# EAGLE board 7Segment_Shield (EAGLE 6.1)
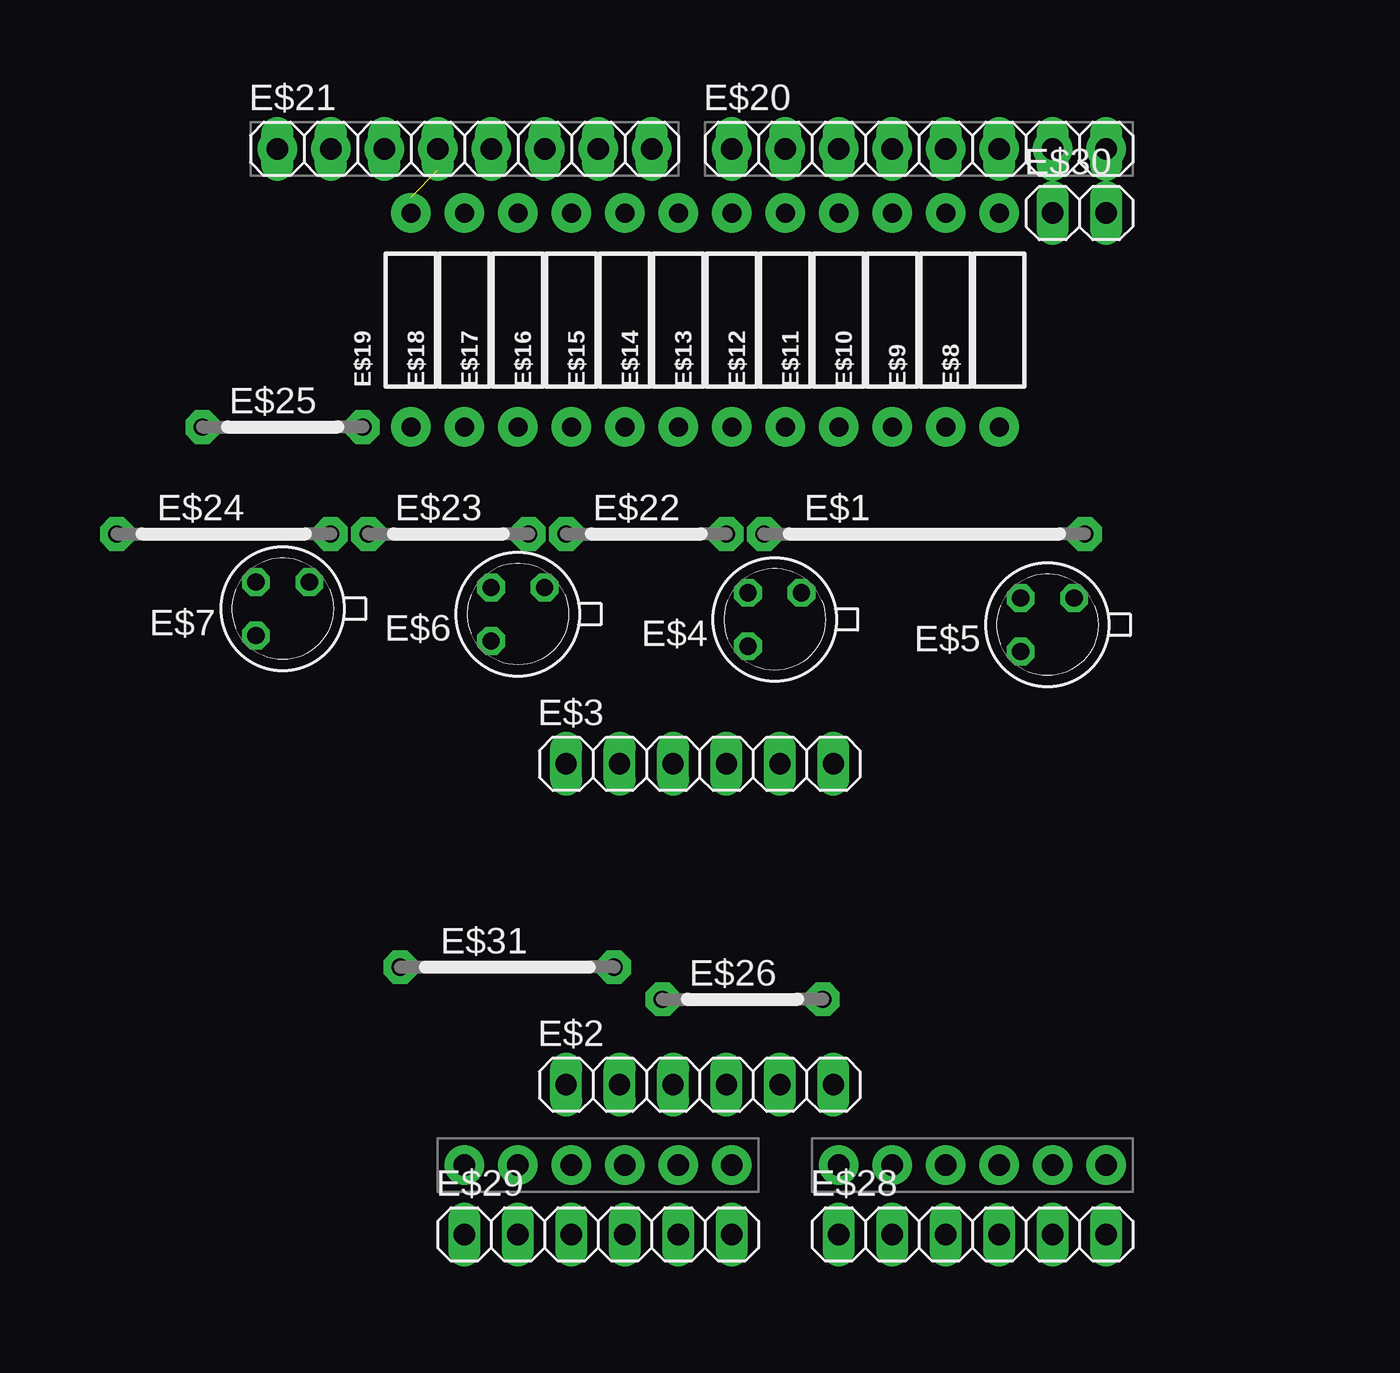
[diagram p0: board, top side]
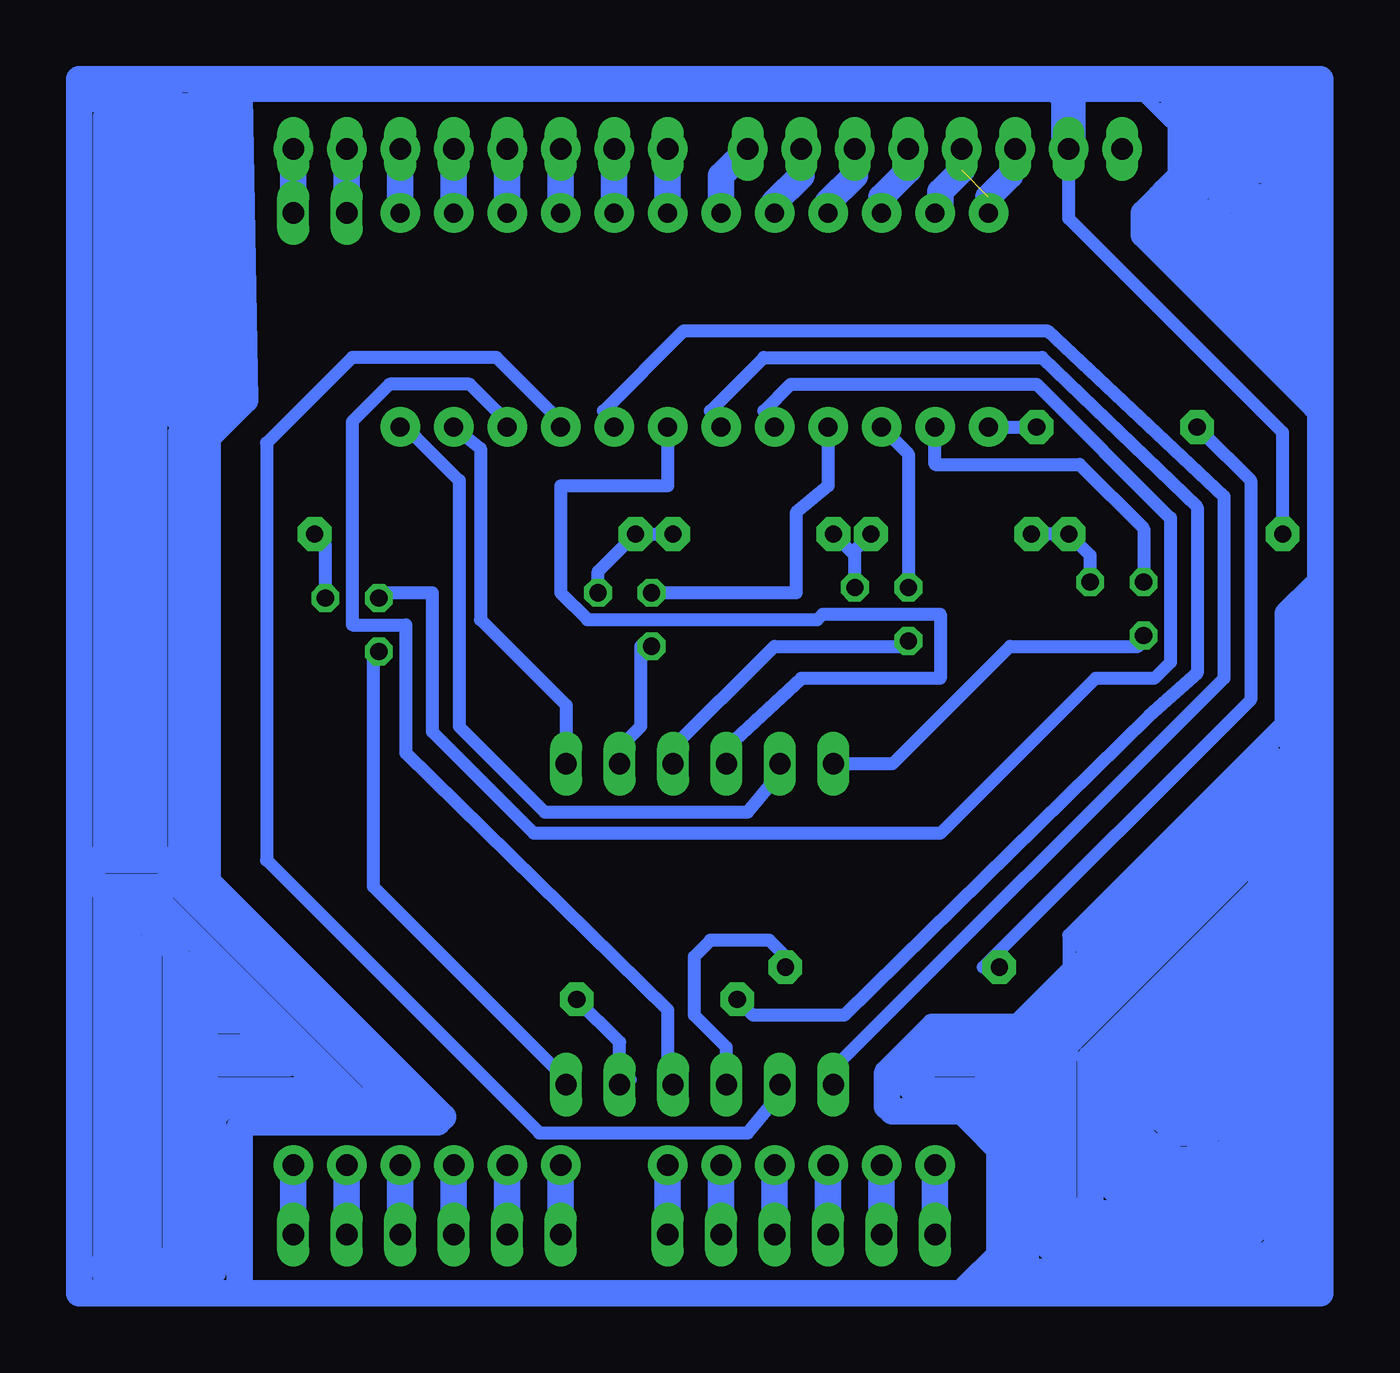
[diagram p1: board, bottom side, seen from below]

No outline drawn. Coordinates in mm, seen from the top.
Copper layers (1*16): Top 0.035mm / dielectric 1.5mm / Bottom 0.035mm
Design rules: minimum track width 10mil, minimum drill 24mil, track to track 8mil, track to pad 8mil, pad to pad 8mil, via to via 8mil, smd to smd 8mil, copper to edge 40mil, drill to drill 8mil, minimum pad ring 10mil, minimum via ring 8mil, stop-mask expansion 4mil, vias tented up to drill 0mil, thermal gap 10mil

## Footprints (pad centres in the part's own frame; a part is rotated, then mirrored left to right if it is on the bottom)
15 = drill 0.813 pad 1.6 octagon: 1 -7.62,0; 2 7.62,0
1X06 = drill 1.016 long: 1 -6.35,0; 2 -3.81,0; 3 -1.27,0; 4 1.27,0; 5 3.81,0; 6 6.35,0
TO18A = drill 0.813 octagon: B 1.27,-1.27; C 1.27,1.27; E -1.27,-1.27
AXIAL-0.4 = drill 0.9 pad 1.88: P$1 -5.08,0; P$2 5.08,0
1X08 = drill 1.016 long: 1 -8.89,0; 2 -6.35,0; 3 -3.81,0; 4 -1.27,0; 5 1.27,0; 6 3.81,0; 7 6.35,0; 8 8.89,0
07 = drill 0.813 pad 1.6 octagon: 1 -3.81,0; 2 3.81,0
10 = drill 0.813 pad 1.6 octagon: 1 -5.08,0; 2 5.08,0
DUEMILANOVE_VIAS = drill 1.016 pad 1.88: 3.3V 50.8,13.97; 5V 50.8,16.51; A0 50.8,29.21; A1 50.8,31.75; A2 50.8,34.29; A3 50.8,36.83; A4 50.8,39.37; A5 50.8,41.91; AREF 2.54,2.54; D2 2.54,36.83; D3 2.54,34.29; D4 2.54,31.75; D5 2.54,29.21; D6 2.54,26.67; D7 2.54,24.13; D8 2.54,20.32; D9 2.54,17.78; D10 2.54,15.24; D11 2.54,12.7; D12 2.54,10.16; D13 2.54,7.62; GND@0 50.8,19.05; GND@1 50.8,21.59; GND@2 2.54,5.08; RES 50.8,11.43; RX 2.54,41.91; TX 2.54,39.37; VIN 50.8,24.13
1X02 = drill 1.016 long: 1 -1.27,0; 2 1.27,0

## Placement (x,y rotation side)
E$1  [15]  53.09,52.58 0 top
E$2  [1X06]  42.42,26.42 0 top
E$3  [1X06]  42.42,41.66 0 top
E$4  [TO18A]  45.97,48.51 180 top
E$5  [TO18A]  58.93,48.26 180 top
E$6  [TO18A]  33.78,48.77 180 top
E$7  [TO18A]  22.61,49.02 180 top
E$8  [AXIAL-0.4]  56.64,62.74 90 top
E$9  [AXIAL-0.4]  54.1,62.74 90 top
E$10  [AXIAL-0.4]  51.56,62.74 90 top
E$11  [AXIAL-0.4]  49.02,62.74 90 top
E$12  [AXIAL-0.4]  46.48,62.74 90 top
E$13  [AXIAL-0.4]  43.94,62.74 90 top
E$14  [AXIAL-0.4]  41.4,62.74 90 top
E$15  [AXIAL-0.4]  38.86,62.74 90 top
E$16  [AXIAL-0.4]  36.32,62.74 90 top
E$17  [AXIAL-0.4]  33.78,62.74 90 top
E$18  [AXIAL-0.4]  31.24,62.74 90 top
E$19  [AXIAL-0.4]  28.7,62.74 90 top
E$20  [1X08]  52.83,70.87 0 top
E$21  [1X08]  31.24,70.87 0 top
E$22  [07]  39.88,52.58 0 top
E$23  [07]  30.48,52.58 0 top
E$24  [10]  19.81,52.58 0 top
E$25  [07]  22.61,57.66 0 top
E$26  [07]  44.45,30.48 0 top
E$27  [DUEMILANOVE_VIAS]  19.81,73.41 270 top
E$28  [1X06]  55.37,19.3 0 top
E$29  [1X06]  37.59,19.3 0 top
E$30  [1X02]  60.45,67.82 0 top
E$31  [10]  33.27,32 0 top

## Library data of the parts
E$1 E$22-E$26 E$31 = jumper
E$2 E$3 E$20 E$21 E$28-E$30 = pinhead
E$4-E$7 = ref-packages
E$8-E$19 = SparkFun-Passives
E$27 = SparkFun-Boards

## Nets
S$1: E$8.P$2
S$2: E$9.P$2
S$3: E$10.P$2
S$4: E$11.P$2
S$5: E$12.P$2
S$6: E$13.P$2
S$7: E$14.P$2
S$9: E$16.P$2
S$10: E$17.P$2
S$12: E$7.B E$18.P$1
S$13: E$6.B E$17.P$1
S$14: E$4.B E$16.P$1
S$15: E$5.B E$15.P$1
S$16: E$7.E E$23.1 E$24.2
S$17: E$3.1 E$7.C
S$18: E$3.4 E$6.C
S$19: E$3.5 E$4.C
S$20: E$3.2 E$8.P$1
S$21: E$3.6 E$9.P$1
S$22: E$2.4 E$10.P$1
S$23: E$2.2 E$11.P$1
S$24: E$3.3 E$13.P$1
S$25: E$2.6 E$5.C
S$26: E$14.P$1 E$26.1
S$27: E$6.E E$22.1 E$23.2
S$28: E$1.1 E$4.E
S$29: E$19.P$1 E$25.2
S$30: E$1.2 E$5.E
S$31: E$2.1 E$12.P$1
S$32: E$2.5
S$33: E$26.2
S$34: E$21.2 E$24.1
S$36: E$27.RES
S$37: E$27.3.3V E$29.2
S$38: E$27.5V
S$39: E$27.GND@0 E$29.4
S$40: E$27.GND@1
S$41: E$27.VIN E$29.6
S$42: E$27.A0 E$28.1
S$43: E$27.A1 E$28.2
S$44: E$27.A2 E$28.3
S$45: E$27.A3
S$46: E$27.A4
S$47: E$27.A5
S$48: E$30.1
S$49: E$20.8 E$30.2
S$52: E$2.3 E$31.2

## Tracks (layer width: path | path; a pad name or v marks a point on that pad's centre or on a via)
S$1
  Bottom 1.27: E$8.P$2 56.64,71.12
S$2
  Bottom 1.27: E$9.P$2 54.1,70.87
S$3
  Bottom 1.27: E$10.P$2 51.56,70.87
S$4
  Bottom 1.27: E$11.P$2 49.02,70.87
S$5
  Bottom 1.27: E$12.P$2 46.48,70.87
S$6
  Bottom 1.27: E$13.P$2 43.94,70.87
S$7
  Bottom 1.27: E$14.P$2 41.4,69.6 40.13,70.87
S$8
  Bottom 1.27: 38.86,68.07 38.86,68.33 37.59,69.6 37.59,70.87
S$9
  Bottom 1.27: E$16.P$2 36.32,68.33 35.05,69.6 35.05,70.87
S$10
  Bottom 1.27: E$17.P$2 33.78,68.58 32.51,69.85 32.51,70.87
S$11  (1 unrouted)
  Bottom 1.27: 30.99,67.82 30.99,68.83 29.97,69.85 | 28.7,67.56 28.7,68.58 27.69,69.6
S$12
  Bottom 0.61: E$7.B 21.34,52.83 24.38,55.88 31.24,55.88 E$18.P$1
S$13
  Bottom 0.254: 32.51,49.78 E$6.B
  Bottom 0.61: E$6.B 32.51,56.39 E$17.P$1
S$14
  Bottom 0.254: 45.21,49.78 E$4.B
  Bottom 0.61: E$4.B 37.85,49.78 37.85,53.59 36.32,54.86 E$16.P$1
S$15
  Bottom 0.254: 57.91,49.78 E$5.B
  Bottom 0.61: 57.91,49.78 55.12,49.78 55.12,43.18 50.29,38.35 30.99,38.35 23.62,45.72 20.83,45.72 20.07,46.48 20.07,53.34 26.42,59.69 38.1,59.69 39.37,58.42 E$15.P$1
S$16
  Bottom 0.61: E$7.E 23.88,51.56 E$24.2 E$23.1
S$17
  Bottom 0.61: E$7.C 21.59,47.24 27.69,47.24 33.27,41.66 E$3.1
S$18
  Bottom 0.254: 32.51,47.24 E$6.C
  Bottom 0.61: 32.51,47.24 38.86,47.24 43.94,42.16 E$3.4
S$19
  Bottom 0.61: E$4.C 45.21,47.24 45.21,43.43 46.48,42.16 E$3.5
S$20
  Bottom 0.61: E$3.2 38.86,40.89 40.13,39.37 49.78,39.37 53.85,43.43 53.85,55.12 55.88,57.15 E$8.P$1
S$21
  Bottom 0.61: E$3.6 48.77,44.45 52.83,48.51 52.83,56.64 E$9.P$1
S$22
  Bottom 0.61: E$2.4 43.94,26.92 43.94,29.97 56.39,42.16 56.39,48.26 58.93,48.26 58.93,57.91 57.15,59.69 53.34,59.69 52.07,58.42 E$10.P$1
S$23
  Bottom 0.61: E$2.2 38.86,25.65 40.13,24.13 50.04,24.13 62.99,37.08 62.99,56.9 58.93,60.96 52.07,60.96 49.53,58.42 E$11.P$1
S$24
  Bottom 0.61: E$13.P$1 43.94,54.86 49.02,54.86 49.02,49.78 47.75,48.51 36.83,48.51 36.58,48.77 30.99,48.77 30.99,45.72 37.59,45.72 41.4,42.16 E$3.3
S$25
  Bottom 0.254: 57.91,47.24 E$5.C
  Bottom 0.61: 57.91,47.24 57.91,35.81 49.02,26.92 E$2.6
S$26
  Bottom 0.61: E$14.P$1 41.91,58.42 39.37,60.96 26.16,60.96 18.8,53.85 18.8,45.97 21.08,43.94 35.56,29.72 39.88,29.72 E$26.1
S$27
  Bottom 0.61: E$6.E 35.05,51.56 | 35.05,51.56 E$22.1 | 35.05,51.56 35.05,51.82 E$23.2
S$28
  Bottom 0.61: E$4.E 47.24,50.8 E$1.1 43.43,52.58
S$29
  Bottom 0.61: E$19.P$1 E$25.2
S$30
  Bottom 0.61: E$5.E 60.2,52.07 E$1.2
S$31
  Bottom 0.61: E$2.1 36.32,26.92 17.53,45.72 17.53,54.36 25.91,62.23 43.18,62.23 46.99,58.42 E$12.P$1
S$32
  Bottom 0.61: 45.72,26.67 E$2.5
S$33
  Bottom 0.61: 46.23,26.67 46.23,28.45 E$26.2
S$34
  Bottom 0.61: E$24.1 14.73,57.4 24.89,67.56 E$21.2 24.89,72.64
S$35
  Bottom 0.61: 17.53,72.14 20.07,72.14 21.84,73.91
S$36
  Bottom 1.27: E$27.RES 31.24,19.05
S$37
  Bottom 1.27: E$27.3.3V E$29.2
S$38
  Bottom 1.27: E$27.5V 36.32,19.05
S$39
  Bottom 1.27: E$27.GND@0 E$29.4
S$40
  Bottom 1.27: E$27.GND@1 41.4,19.05
S$41
  Bottom 1.27: E$27.VIN E$29.6
S$42
  Bottom 1.27: E$27.A0 E$28.1
S$43
  Bottom 1.27: E$27.A1 E$28.2
S$44
  Bottom 1.27: E$27.A2 E$28.3
S$45
  Bottom 1.27: E$27.A3 56.64,19.05
S$46
  Bottom 1.27: E$27.A4 59.18,19.05
S$47
  Bottom 1.27: E$27.A5 61.72,19.05
S$48
  Bottom 1.27: E$30.1 59.18,71.37
S$49
  Bottom 1.27: E$30.2 E$20.8
S$50
  Bottom 0.61: 71.88,16.51 71.88,72.9 64.26,73.41 25.65,73.41 | 25.65,73.41 24.89,73.41 | 24.89,73.41 13.46,73.41 12.95,72.39 | 24.89,73.41 25.15,73.15 25.15,70.61 24.89,70.87 24.89,73.41 | 25.4,70.87 25.4,73.15 25.65,73.41 | 14.48,47.5 14.48,43.94 24.89,33.53 24.89,32 27.43,29.46 31.5,29.46 33.78,27.18
  Bottom 1.27: 12.95,59.94 20.57,67.56 20.57,68.58 | 20.57,68.58 20.32,68.83 | 20.32,68.83 19.56,69.6 19.56,72.14 20.07,72.64 13.46,72.64 12.95,72.39 | 12.95,72.39 12.95,59.94 | 12.95,59.94 12.95,58.67 | 12.95,58.67 12.95,50.04 | 12.95,50.04 12.95,16.51 71.88,16.51 71.88,74.17 12.95,74.17 12.95,72.39 | 12.95,50.04 13.21,50.04 14.48,48.77 14.48,47.5 14.48,43.69 | 64.26,73.41 64.01,58.93 65.79,57.15 65.79,36.07 | 64.26,16.76 64.26,24.38 64.01,24.64 54.86,24.64 54.61,24.89 65.79,36.07 | 65.79,36.07 66.8,37.08 71.37,37.08 | 12.95,58.67 13.21,58.67 21.34,66.8 21.34,67.82 20.57,68.58 | 20.32,68.83 19.81,68.83 18.8,67.82 18.29,67.82 14.48,64.01 14.48,69.6 15.75,70.87
S$51
  Bottom 0.61: 24.38,70.87 24.38,73.15
S$52
  Bottom 0.61: E$31.2 38.35,32.51 39.12,33.27 41.91,33.27 42.67,32.51 42.67,29.72 41.15,28.19 E$2.3
S$53
  Bottom 1.27: 26.92,17.78 26.92,22.86 | 26.92,22.86 26.92,28.96 | 26.92,22.86 27.69,22.86 29.97,25.15 33.27,25.15 33.53,25.4 33.53,26.92 32.51,27.94 32.26,27.94 32,27.69 29.46,27.69
S$54
  Bottom 1.27: 26.67,29.72 14.48,41.91
S$55
  Bottom 0.406: 23.88,27.69 24.38,27.69 24.64,27.94
  Bottom 1.27: 14.48,41.15 14.48,40.39 25.91,28.96 25.91,18.8 25.4,18.29 15.49,18.29 14.99,18.8 14.99,38.61 14.73,38.86 14.73,38.61 25.15,28.19 25.15,20.07 24.38,19.3 16.26,19.3 15.24,20.32 15.24,35.56 15.75,36.07 15.75,35.81 23.88,27.69 23.88,20.83 24.38,20.32 24.38,19.56 25.4,18.54 24.89,18.54 23.11,20.32 16.76,20.32 16.26,20.83 16.26,33.78 16.51,34.04 16.51,33.78 22.86,27.43 22.86,21.59 22.35,21.08 17.53,21.08 17.02,21.59 17.02,24.13 | 17.02,24.13 17.02,31.5 17.53,32 17.53,31.5 21.84,27.18 21.84,28.96 16.26,34.54 16.26,23.37 17.78,21.84 21.59,21.84 22.35,22.61 22.35,25.91 21.59,26.67 21.08,26.67 17.78,29.97 17.78,27.69 18.8,27.69 | 18.8,27.69 19.05,27.43 | 18.8,27.69 18.54,27.94 18.29,27.94 17.78,27.43 18.03,27.18 19.81,27.18 | 21.08,27.18 19.81,27.18 | 19.81,27.18 18.54,25.91 14.73,25.91 14.48,25.65 21.08,25.65 21.59,26.16 20.07,26.16 19.81,25.91 19.56,26.16 21.84,26.16 22.61,25.4 18.29,25.4 17.02,24.13 | 17.02,24.13 17.27,24.13 17.53,24.38 20.07,24.38 20.57,24.89 21.59,24.89 21.59,24.13 21.08,23.62 21.08,22.86 18.03,22.86 17.78,23.11 18.03,23.11 19.05,24.13 19.81,24.13 20.32,23.62
S$56
  Bottom 1.27: 13.72,61.47 13.72,71.37 14.22,71.88 18.03,71.88 18.54,71.37 18.54,69.09 19.81,67.82 19.56,67.82 14.22,62.48 14.22,70.36 14.99,71.12 17.27,71.12 17.53,70.87 17.53,68.33 18.03,67.82 14.99,64.77 14.99,69.34 15.49,69.85 16.26,69.85 16.51,70.1 16.51,67.82 15.49,66.8 15.49,68.33 15.75,68.58
S$57
  Bottom 1.27: 67.06,37.34 67.06,57.4 65.02,59.44 65.02,72.14 65.28,72.39 70.61,72.39 70.61,37.59 69.6,37.59 | 69.6,37.59 69.09,38.1 69.09,70.61 70.1,71.63 69.85,71.63 69.6,71.37 69.6,37.59 | 69.6,37.59 68.58,37.59 68.33,37.85 68.33,70.87 68.83,71.37 66.29,71.37 66.29,59.18 67.31,58.17 67.31,70.36 67.56,70.61
S$58
  Bottom 1.27: 56.39,25.4 56.64,25.4 67.56,36.32
S$59
  Bottom 1.27: 67.82,35.81 70.87,35.81 71.12,36.07
S$60
  Bottom 1.27: 70.61,35.56 70.61,18.03 70.87,17.78
S$61
  Bottom 1.27: 70.61,17.27 65.79,17.27 65.53,17.53
S$62
  Bottom 1.27: 65.53,17.78 65.53,24.89 65.02,25.4
S$63
  Bottom 1.27: 64.52,25.4 57.4,25.4 56.9,25.91
S$64
  Bottom 1.27: 58.42,25.65 58.67,25.65 68.07,35.05
S$65
  Bottom 1.27: 68.58,35.05 69.6,35.05 69.85,34.8
S$66
  Bottom 1.27: 69.6,34.29 69.6,18.54 69.34,18.29
S$67
  Bottom 1.27: 69.6,18.03 68.83,18.03 | 68.83,18.03 66.29,18.03 66.04,18.29 | 68.58,33.02 68.58,18.29 68.83,18.03
S$68
  Bottom 1.27: 67.31,18.8 67.31,32.77 68.83,34.29
S$69
  Bottom 1.27: 66.29,18.54 66.29,31.75 65.79,32.26
S$70
  Bottom 1.27: 66.29,32.26 60.45,26.42
S$71
  Bottom 1.27: 60.45,26.16 65.53,26.16 65.79,26.42
S$72
  Bottom 1.27: 66.04,27.43 61.98,27.43
S$73
  Bottom 1.27: 62.99,28.19 65.53,28.19 65.79,28.45
S$74
  Bottom 1.27: 66.04,29.46 64.01,29.46 63.5,28.96
S$75
  Bottom 1.27: 65.02,30.48 66.29,30.48 66.8,30.99
S$76
  Bottom 1.27: 32.26,26.16 28.96,26.16
S$77
  Bottom 1.27: 28.7,25.4 29.72,25.4
S$78
  Bottom 1.27: 16.76,32.77 16.76,27.43 18.03,26.16
S$79
  Bottom 1.27: 14.22,42.93 14.48,42.93
S$80
  Bottom 0.61: 64.52,73.15 70.87,73.15 71.12,73.41 67.31,73.41 65.53,71.63
S$81
  Bottom 0.406: 15.49,36.58 15.75,36.58 15.75,37.08
S$82
  Bottom 0.61: 32,28.45 27.43,28.45 27.18,28.7
S$84
  Bottom 0.61: 18.54,57.4 16.26,55.12 16.26,44.7 28.96,32
S$85
  Bottom 0.406: 29.21,26.67 28.96,26.92 28.19,26.92
  Bottom 1.27: 32.51,26.42 31.5,27.43 28.19,27.43 28.19,26.92 28.19,18.29 29.72,16.76 14.22,16.76 13.46,17.53 13.46,48.01 13.97,48.51 13.97,18.29 14.73,17.53 27.69,17.53 28.19,18.03
S$86
  Bottom 0.61: 31.75,28.96 25.65,28.96
S$87
  Bottom 0.61: 28.96,28.19 25.65,28.19
S$88
  Bottom 0.61: 27.18,27.69 27.69,27.69 27.94,27.94
S$89
  Bottom 0.61: 24.64,33.02 15.24,42.42 15.24,42.67 14.48,43.43